# Altium PCB ROS_CAR.PcbDoc (part 7 of 13)
Units mil, origin at the board's own origin, x right, y up, seen from the top; angles counter-clockwise.
Board outline 3937.01 x 3937.01 mil, 2 copper layers (Top Layer, Bottom Layer); 201 components, 155 nets, 998 pads, 0 vias.
Unrouted connection lines stored in the file: 3.
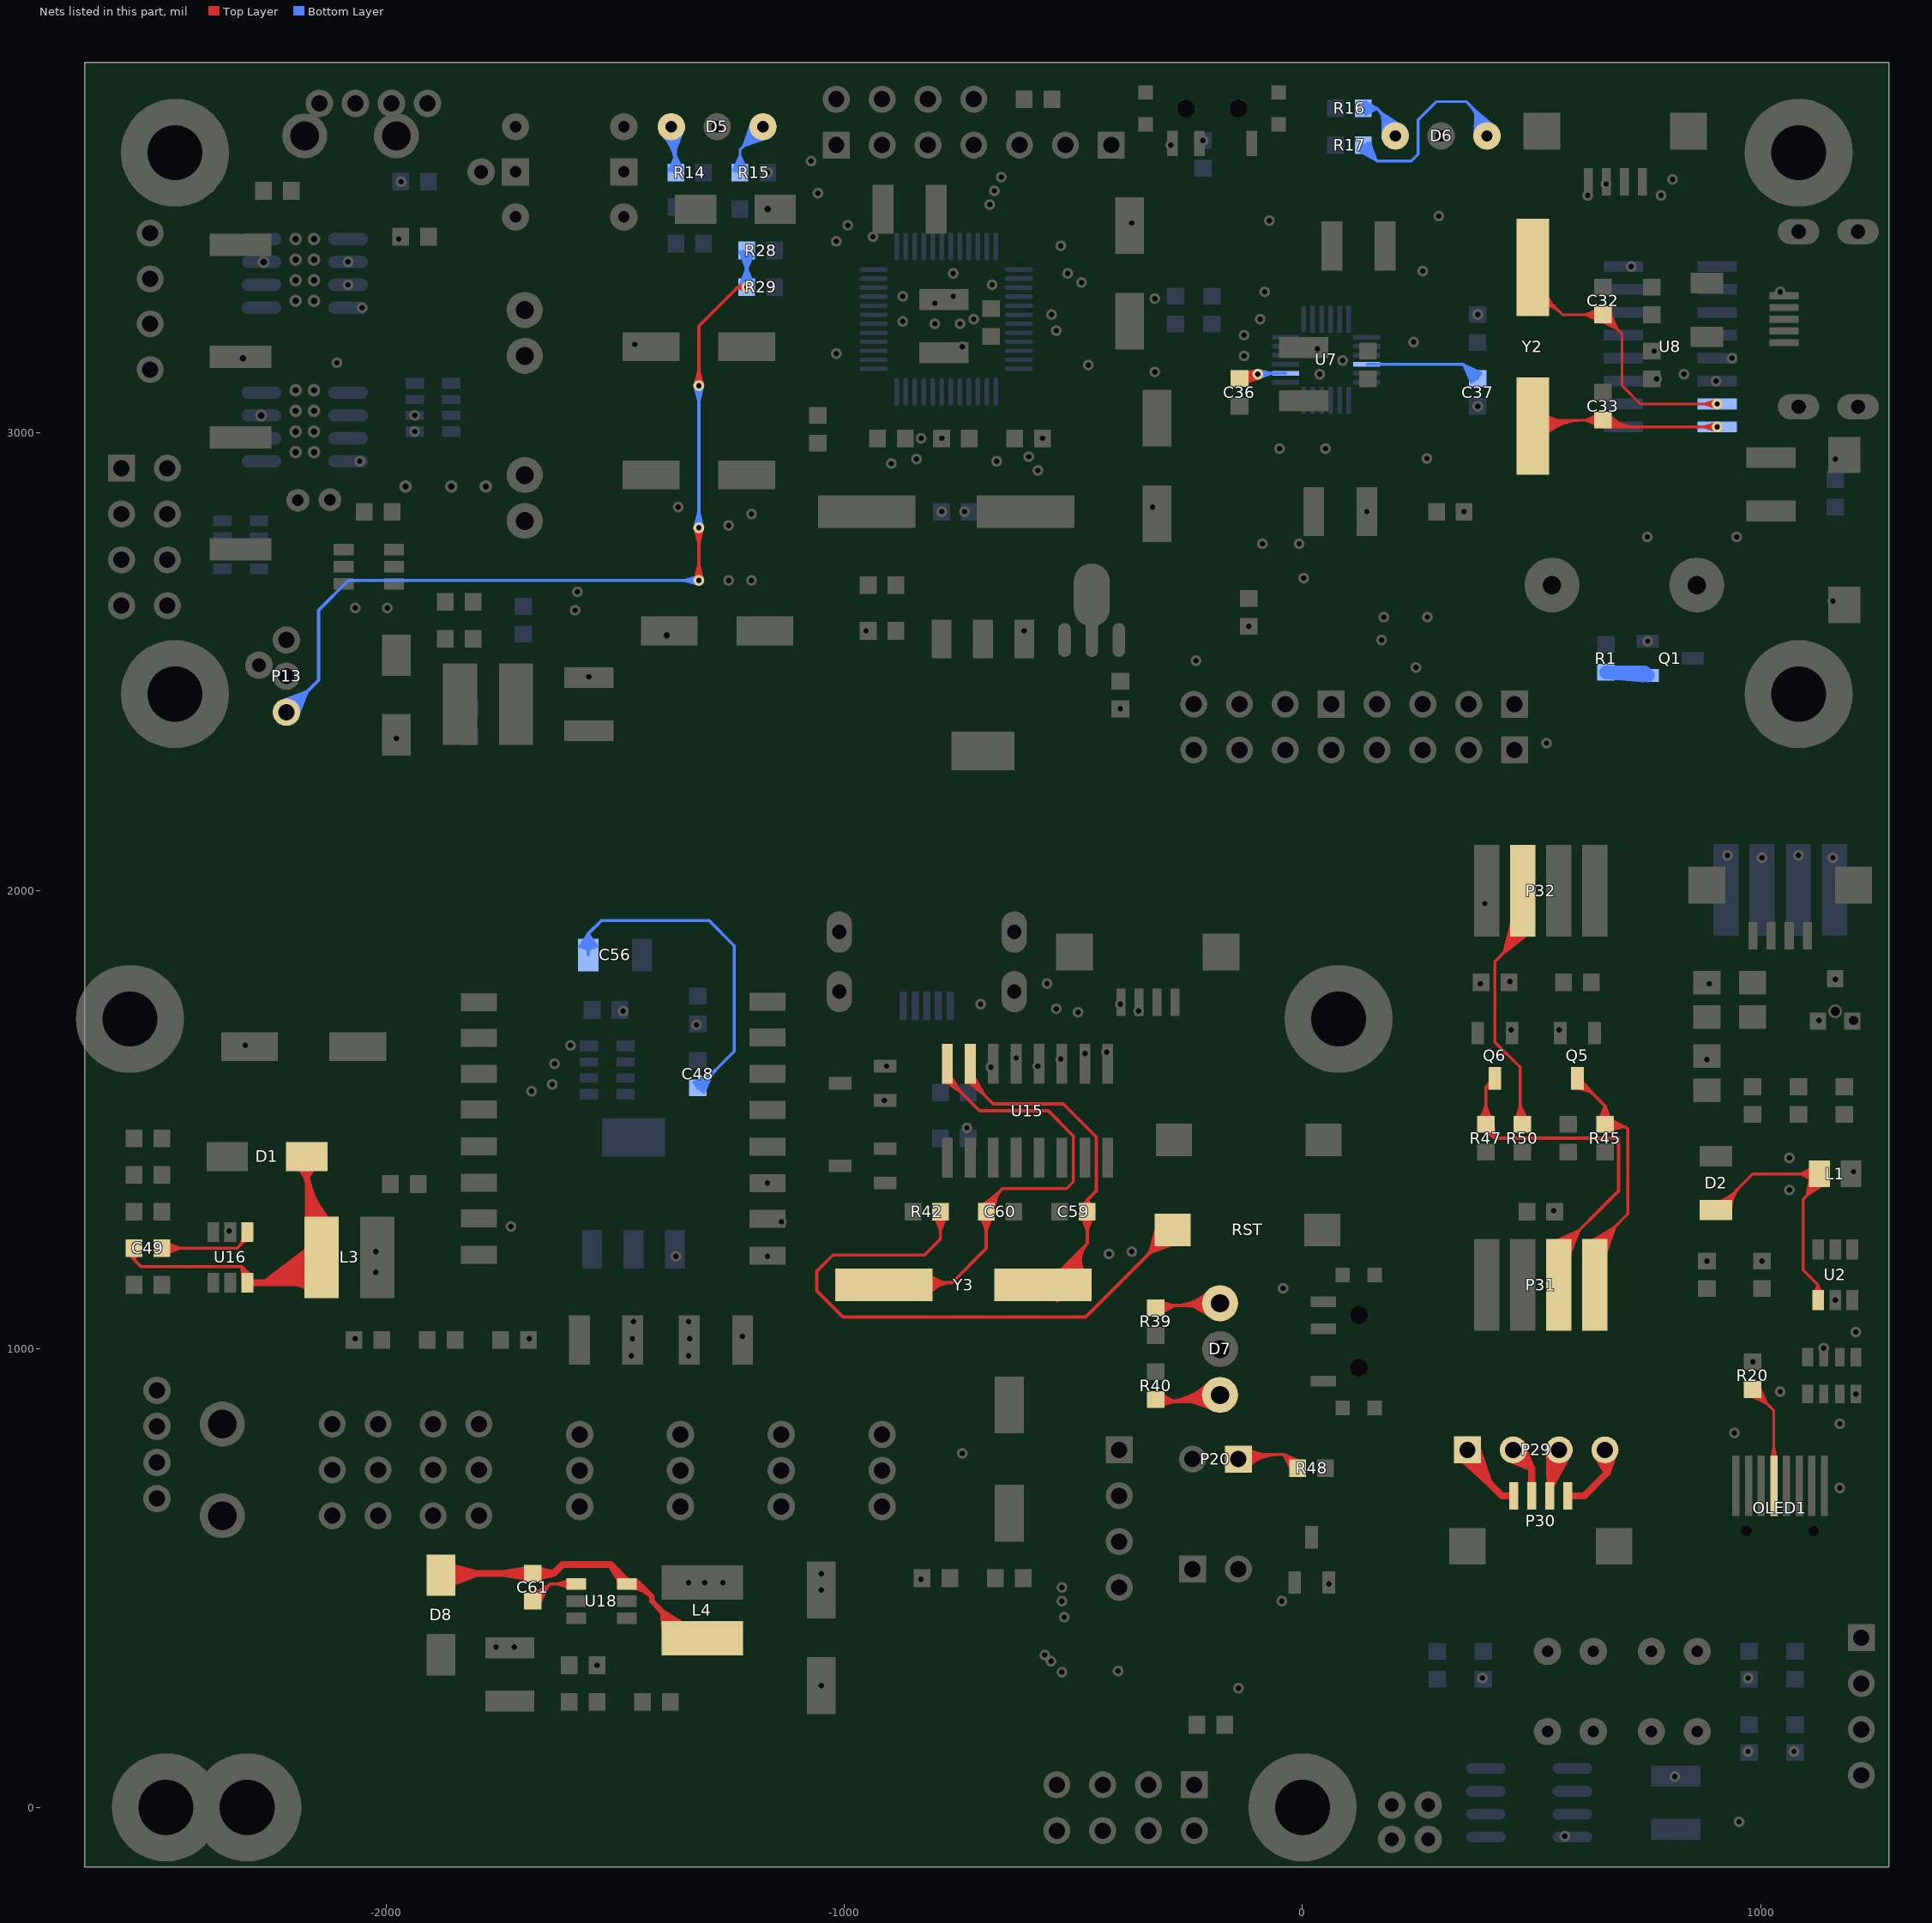
[diagram p7: the nets of this part, all layers, seen from the top]

## Nets (pads, with @x,y where several pads share a name; then routed paths per layer and width w, separated by ;. In a path a pad name is that pad's centre, name@x,y a point inside that pad or via, vN(x,y) a via of type N, cw(c..) or ccw(c..) an arc to the next point about the centre after c; other vN are vias at no path point) (continued)
NetC32_2: C32.2 pad.1@904.88,3062.09 U8.7 Y2.2 | length 2034.1
  Top Layer w6: Y2.2@501.48,3292.86 cw(c513.28,3254.29) 541.8,3282.81 ; Y2.2@501.66,3281.06 543.63,3280.97 ; Y2.2@502.08,3275.02 543.63,3280.97 ; Y2.2@503.23,3287.12 cw(c516.58,3243.48) 548.85,3275.75 ; Y2.2@503.39,3269.03 543.63,3280.97 ; Y2.2@504.99,3281.38 cw(c519.89,3232.67) 555.91,3268.69 ; Y2.2@505.04,3297.5 543.63,3280.97 ; Y2.2@505.61,3263.2 543.63,3280.97 ; Y2.2@506.74,3275.65 cw(c523.2,3221.86) 562.97,3261.63 ; Y2.2@507.52,3317.09 567.83,3256.77 C32.2@655.51,3256.77 697.52,3214.76 697.52,3102.09 737.52,3062.09 pad.1@904.88,3062.09 ; Y2.2@507.82,3302.87 543.63,3280.97 ; Y2.2@508.75,3257.62 543.63,3280.97 ; Y2.2@511.39,3307.86 543.63,3280.97 ; Y2.2@515.74,3312.34 543.63,3280.97 ; Y2.2@520.83,3316.22 543.63,3280.97 ; C32.2@643.7,3245.95 ccw(c617.57,3219.82) 617.57,3256.77 ccw(c617.57,3293.73) C32.2@643.7,3267.6 ; C32.2@647.56,3244.34 686.55,3225.74 ; C32.2@647.95,3250.19 ccw(c632.06,3234.3) 632.06,3256.77 ccw(c632.06,3279.24) C32.2@647.95,3263.35 ; C32.2@650.55,3249.61 686.55,3225.74 ; C32.2@651.3,3241.81 618.22,3256.77 ; C32.2@651.3,3271.73 618.22,3256.77 ; C32.2@653.33,3247.54 618.22,3256.77 ; C32.2@653.33,3266 618.22,3256.77 ; C32.2@654.21,3254.38 686.55,3225.74 ; C32.2@654.38,3253.47 618.22,3256.77 ; C32.2@654.38,3260.08 618.22,3256.77 ; C32.2@654.53,3256.77 618.22,3256.77 ; C32.2@656.5,3241.46 cw(c656.5,3206.89) 680.95,3231.34 ; C32.2@656.5,3247.46 cw(c656.5,3227.37) C32.2@670.7,3241.58 ; C32.2@656.5,3256.77 686.55,3225.74 ; C32.2@658.96,3258.98 686.55,3225.74 ; C32.2@663.84,3262.49 686.55,3225.74 ; C32.2@665.8,3256.77 ccw(c690.65,3256.77) C32.2@673.08,3239.2 ; C32.2@669.21,3265.3 686.55,3225.74 ; C32.2@671.8,3256.77 ccw(c711.13,3256.77) 683.32,3228.96 ; pad.1@898.65,3055.86 ccw(c883.61,3040.82) 883.61,3062.09 ccw(c883.61,3083.36) pad.1@898.65,3068.32 ; pad.1@903.58,3053.37 875.07,3062.09 pad.1@903.58,3070.8
NetC33_2: C33.2 pad.1@904.88,3012.09 U8.8 Y2.1 | length 2411
  Top Layer w6: Y2.1@501.04,3028.22 557.33,3026.77 ; Y2.1@501.21,3022.19 557.33,3026.77 ; Y2.1@501.52,3034.27 557.33,3026.77 ; Y2.1@502.67,3040.29 557.33,3026.77 ; Y2.1@502.83,3026.77 C33.2@655.51,3026.77 670.2,3012.09 pad.1@904.88,3012.09 ; Y2.1@504.24,3012.14 cw(c539.57,2976.81) 539.57,3026.77 ; Y2.1@504.49,3046.23 557.33,3026.77 ; Y2.1@505.06,3005.82 557.33,3026.77 ; Y2.1@507.6,3000.35 557.33,3026.77 ; Y2.1@508.48,3007.9 cw(c554.05,2962.33) 554.05,3026.77 ; Y2.1@510.74,2995.15 557.33,3026.77 ; Y2.1@512.73,3003.65 cw(c568.54,2947.84) 568.54,3026.77 ; Y2.1@514.45,2990.27 557.33,3026.77 ; Y2.1@516.97,2999.41 cw(c583.02,2933.35) 583.02,3026.77 ; Y2.1@518.73,2985.77 557.33,3026.77 ; Y2.1@521.21,2995.17 cw(c597.51,2918.87) 597.51,3026.77 ; Y2.1@525.45,2990.93 cw(c611.99,2904.38) 611.99,3026.77 ; Y2.1@525.45,3036.79 ccw(c549.65,3060.98) 549.65,3026.77 ; C33.2@643.7,3015.95 ccw(c617.57,2989.82) 617.57,3026.77 ccw(c617.57,3063.73) C33.2@643.7,3037.6 ; C33.2@647.95,3020.19 ccw(c632.06,3004.3) 632.06,3026.77 ccw(c632.06,3049.24) C33.2@647.95,3033.35 ; C33.2@650.35,3020.62 ccw(c670.96,3041.24) C33.2@670.96,3012.09 ; C33.2@651.3,3011.81 618.22,3026.77 ; C33.2@651.3,3041.73 618.22,3026.77 ; C33.2@653.33,3017.54 618.22,3026.77 ; C33.2@653.33,3036 618.22,3026.77 ; C33.2@654.21,3011.64 702.51,3012.09 ; C33.2@654.38,3023.47 618.22,3026.77 ; C33.2@654.38,3030.08 618.22,3026.77 ; C33.2@654.53,3017.67 702.51,3012.09 ; C33.2@654.53,3026.77 618.22,3026.77 ; C33.2@654.59,3024.87 ccw(c685.45,3055.72) 685.45,3012.09 ; C33.2@655.6,3023.59 702.51,3012.09 ; C33.2@656.5,3026.77 702.51,3012.09 ; C33.2@657.61,3029.89 702.51,3012.09 ; C33.2@658.83,3029.11 ccw(c699.93,3070.21) 699.93,3012.09 ; C33.2@660.17,3035.32 702.51,3012.09 ; C33.2@663.08,3033.35 ccw(c714.42,3084.69) 714.42,3012.09 ; C33.2@663.4,3040.43 702.51,3012.09 ; C33.2@667.32,3037.6 ccw(c728.9,3099.18) 728.9,3012.09 ; pad.1@898.65,3005.86 ccw(c883.61,2990.82) 883.61,3012.09 ccw(c883.61,3033.36) pad.1@898.65,3018.32 ; pad.1@903.58,3003.37 875.07,3012.09 pad.1@903.58,3020.8
NetC36_2: C36.2 pad.1@-97.48,3127.09 U7.20 | length 1459.9
  Top Layer w6: C36.2@-137.72,3126.63 pad.1@-98.96,3127.09 ; C36.2@-137.48,3117.4 -127.8,3127.09 pad.1@-97.48,3127.09 ; C36.2@-137.32,3132.69 pad.1@-98.96,3127.09 ; C36.2@-137.19,3120.64 pad.1@-98.96,3127.09 ; C36.2@-136.5,3117.4 pad.1@-98.96,3127.09 ; C36.2@-135.53,3114.24 pad.1@-98.96,3127.09 ; C36.2@-133.49,3116.02 cw(c-116.21,3108.07) -116.21,3127.09 ; C36.2@-133.11,3108.73 pad.1@-98.96,3127.09 ; C36.2@-129.82,3103.63 pad.1@-98.96,3127.09 ; C36.2@-128.04,3113.51 cw(c-106.85,3103.76) pad.1@-106.85,3127.09 ; C36.2@-122.59,3111 cw(c-97.48,3099.45) pad.1@-97.48,3127.09 ; pad.1@-103.71,3120.86 ccw(c-118.75,3105.82) -118.75,3127.09 ccw(c-118.75,3148.36) pad.1@-103.71,3133.32 ; pad.1@-103.54,3133.49 C36.2@-123.97,3108.07 ; pad.1@-102.54,3134.3 C36.2@-125.38,3112.89 ; pad.1@-101.45,3134.95 C36.2@-126.39,3117.45 ; pad.1@-100.8,3135.25 C36.2@-126.79,3119.91 ; pad.1@-100.14,3135.49 C36.2@-127.07,3122.34 ; pad.1@-99.96,3118.63 C36.2@-127.13,3131.2 ; pad.1@-98.88,3135.79 C36.2@-127.29,3126.75 ; pad.1@-98.78,3118.37 -127.29,3127.09 pad.1@-98.78,3135.8 ; pad.1@-98.68,3118.36 C36.2@-127.29,3126.75 ; pad.1@-97.57,3135.9 C36.2@-127.13,3131.2 ; pad.1@-97.38,3118.28 C36.2@-127.07,3122.34 ; pad.1@-96.66,3118.31 C36.2@-126.79,3119.91 ; pad.1@-95.93,3118.41 C36.2@-126.39,3117.45 ; pad.1@-94.63,3118.75 C36.2@-125.38,3112.89 ; pad.1@-93.36,3119.3 C36.2@-123.97,3108.07 ; C36.2@-127.29,3126.75 pad.1@-97.48,3127.09 ; C36.2@-127.13,3131.2 pad.1@-97.48,3127.09 ; C36.2@-127.07,3122.34 pad.1@-97.48,3127.09 ; C36.2@-126.79,3119.91 pad.1@-97.48,3127.09 ; C36.2@-126.39,3117.45 pad.1@-97.48,3127.09 ; C36.2@-125.38,3112.89 pad.1@-97.48,3127.09 ; C36.2@-123.97,3108.07 pad.1@-97.48,3127.09
  Bottom Layer w6: pad.1@-95.76,3135.73 -84.38,3128.98 ; pad.1@-93.39,3119.28 -84.38,3128.98 ; pad.1@-91.25,3120.86 cw(c-71.65,3101.25) -71.65,3128.98 ; pad.1@-91.25,3133.32 ccw(c-80.77,3143.8) -80.77,3128.98 ; pad.1@-89.37,3128.98 U7.20@-36.85,3128.98 ; U7.20@-61.46,3128.98 -84.38,3128.98 ; pad.1@-97.48,3127.09 -67.37,3128.98 ; pad.1@-97.48,3127.09 -84.38,3128.98 ; pad.1@-97.48,3127.09 -67.6,3128.98 ; -67.6,3128.98 -95.64,3118.47 -67.37,3128.98 ; -67.6,3128.98 -96.74,3135.87 -67.37,3128.98
NetC37_2: C37.2 U7.10 | length 673.8
  Bottom Layer w6: U7.10@140.31,3148.66 351.26,3148.66 C37.2@382.52,3117.4 ; U7.10@164.92,3148.66 187.84,3148.66 ; 354.71,3145.21 cw(c326.9,3117.4) C37.2@366.23,3117.4 ; 357.08,3142.84 ccw(c381.54,3167.29) C37.2@381.54,3132.71 ; C37.2@364.95,3134.97 cw(c347.38,3117.4) C37.2@372.23,3117.4 ; C37.2@367.33,3132.59 ccw(c381.54,3146.8) C37.2@381.54,3126.71 ; C37.2@368.83,3108.87 351.48,3148.44 ; C37.2@374.19,3111.69 351.48,3148.44 ; C37.2@379.07,3115.19 351.48,3148.44 ; C37.2@381.54,3117.4 351.48,3148.44 ; C37.2@383.82,3119.79 351.48,3148.44 ; C37.2@387.49,3124.56 351.48,3148.44 ; C37.2@390.47,3129.83 351.48,3148.44
NetC48_1: C48.1 C56.2 | length 1320
  Bottom Layer w7: C56.2@-1576.64,1878.49 -1558.66,1906.34 ; C56.2@-1570.22,1875.27 -1558.66,1906.34 ; C56.2@-1568.32,1889.25 ccw(c-1578.6,1906.34) -1558.66,1906.34 ; C56.2@-1563.39,1873.53 -1558.66,1906.34 ; C56.2@-1558.66,1860 -1558.66,1906.34 ; C56.2@-1558.66,1873.19 -1558.66,1906.34 ; C56.2@-1553.93,1873.53 -1558.66,1906.34 ; C56.2@-1549,1889.25 cw(c-1538.72,1906.34) -1558.66,1906.34 ; C56.2@-1547.1,1875.27 -1558.66,1906.34 ; C56.2@-1540.68,1878.49 -1558.66,1906.34 ; C48.1@-1327.85,1581.57 -1286.84,1602.84 ; C48.1@-1324.14,1575.58 -1286.84,1602.84 ; C48.1@-1320,1569.68 -1240,1649.68 -1240,1880 -1295,1935 -1530,1935 -1558.66,1906.34 ; C48.1@-1319.02,1569.68 -1286.84,1602.84 ; C48.1@-1319.02,1584.49 ccw(c-1319.02,1617.86) -1295.42,1594.27 ; C48.1@-1312.97,1564.74 -1286.84,1602.84 ; C48.1@-1311.21,1569.68 cw(c-1289.98,1569.68) C48.1@-1304.99,1584.69 ; C48.1@-1306.87,1561.21 -1286.84,1602.84 ; C48.1@-1304.21,1569.68 cw(c-1266.09,1569.68) -1293.04,1596.64
NetC49_1: C49.1 U16.1 | length 478.3
  Top Layer w7: C49.1@-2489.68,1220 -2325,1220 U16.1@-2300,1245 ; C49.1@-2488.91,1212.23 -2450.38,1220 ; C49.1@-2488.91,1227.77 -2450.38,1220 ; C49.1@-2486.9,1205.46 -2450.38,1220 ; C49.1@-2486.9,1234.54 -2450.38,1220 ; C49.1@-2484.16,1214.48 cw(c-2470.84,1201.15) -2470.84,1220 cw(c-2470.84,1238.85) C49.1@-2484.16,1225.52 ; C49.1@-2479.21,1209.53 cw(c-2453.94,1184.25) -2453.94,1220 cw(c-2453.94,1255.75) C49.1@-2479.21,1230.47 ; -2321.19,1223.81 ccw(c-2343.65,1246.26) U16.1@-2311.89,1246.26 ; -2311.88,1233.12 cw(c-2302.6,1223.84) U16.1@-2302.6,1236.96
NetC49_2: C49.2 D1.2 L3.1 U16.6 | length 4048.4
  Top Layer w7: C49.2@-2564.38,1214.39 -2550.32,1195.32 ; C49.2@-2558.02,1217.73 -2550.32,1195.32 ; C49.2@-2556.81,1205.71 cw(c-2561.88,1195.32) -2550.32,1195.32 ; C49.2@-2550.32,1219.02 -2550.32,1195.32 ; C49.2@-2550.32,1220 -2550.32,1195.32 ; C49.2@-2543.82,1205.71 ccw(c-2538.75,1195.32) -2550.32,1195.32 ; C49.2@-2542.61,1217.73 -2550.32,1195.32 ; C49.2@-2536.25,1214.39 -2550.32,1195.32 ; -2312.3,1177.3 cw(c-2331.13,1158.48) U16.6@-2304.86,1154.12 ; U16.6@-2311.53,1151.17 -2315,1180 ; -2302.68,1167.68 cw(c-2314.62,1155.73) U16.6@-2297.96,1152.97 ; U16.6@-2302.6,1153.74 -2315,1180 ; U16.6@-2300,1165 -2315,1180 ; U16.6@-2294.94,1159 -2315,1180 ; D1.2@-2200.37,1412.53 -2173.39,1367.5 ; D1.2@-2193.96,1415.8 -2173.39,1367.5 ; D1.2@-2193.18,1400.2 cw(c-2240.97,1352.41) -2173.39,1352.41 cw(c-2105.8,1352.41) D1.2@-2153.59,1400.2 ; D1.2@-2188.23,1405.15 cw(c-2224.07,1369.31) -2173.39,1369.31 cw(c-2122.7,1369.31) D1.2@-2158.54,1405.15 ; D1.2@-2187.26,1418.13 -2173.39,1367.5 ; D1.2@-2183.28,1410.1 cw(c-2207.18,1386.21) -2173.39,1386.21 cw(c-2139.6,1386.21) D1.2@-2163.49,1410.1 ; D1.2@-2180.37,1419.53 -2173.39,1367.5 ; L3.1@-2173.99,1243.29 -2173.39,1313.54 ; L3.1@-2173.39,1275.96 ccw(c-2116.24,1275.96) L3.1@-2156.65,1235.56 ; -2173.39,1292.86 ccw(c-2099.35,1292.86) L3.1@-2151.7,1240.5 ; -2173.39,1309.76 ccw(c-2082.45,1309.76) L3.1@-2146.75,1245.45 ; -2173.39,1326.66 ccw(c-2065.55,1326.66) L3.1@-2141.8,1250.4 ; -2173.39,1343.56 ccw(c-2048.65,1343.56) L3.1@-2136.85,1255.35 ; -2173.39,1360.46 ccw(c-2031.75,1360.46) L3.1@-2131.9,1260.3 ; -2173.39,1377.36 ccw(c-2014.85,1377.36) L3.1@-2126.95,1265.25 ; D1.2@-2173.39,1394.26 ccw(c-1997.95,1394.26) L3.1@-2122,1270.2 ; D1.2@-2173.39,1411.16 ccw(c-1981.05,1411.16) L3.1@-2117.05,1275.15 ; L3.1@-2166.83,1243.59 -2173.39,1313.54 ; D1.2@-2166.41,1419.53 -2173.39,1367.5 ; L3.1@-2159.81,1244.61 -2173.39,1313.54 ; D1.2@-2159.51,1418.13 -2173.39,1367.5 ; L3.1@-2152.97,1246.32 -2173.39,1313.54 ; D1.2@-2152.81,1415.8 -2173.39,1367.5 ; L3.1@-2146.37,1248.69 -2173.39,1313.54 ; D1.2@-2146.4,1412.53 -2173.39,1367.5 ; L3.1@-2140,1210 -2173.39,1243.39 D1.2@-2173.39,1420 -2173.39,1367.5 ; L3.1@-2135.9,1254.12 -2173.39,1313.54 ; L3.1@-2130.17,1258.15 -2173.39,1313.54 ; L3.1@-2124.84,1262.76 -2173.39,1313.54 ; L3.1@-2119.96,1267.91 -2173.39,1313.54 ; L3.1@-2115.59,1273.6 -2173.39,1313.54 ; -2550.32,1195.32 -2535,1180 -2315,1180
  Top Layer w15: U16.6@-2302.6,1144.88 -2175.12,1144.88 L3.1@-2160,1160 ; -2222.72,1144.88 ccw(c-2222.72,1230.51) L3.1@-2162.17,1169.96 ; -2203.71,1144.88 cw(c-2203.71,1086.13) L3.1@-2162.17,1127.68 ; -2186.5,1144.88 ccw(c-2186.5,1194.3) L3.1@-2151.56,1159.36 ; L3.1@-2156.34,1225.68 -2262.61,1144.88 ; L3.1@-2147.92,1213.21 -2262.61,1144.88 ; L3.1@-2141.02,1200 -2262.61,1144.88 ; L3.1@-2135.64,1186.11 -2262.61,1144.88 ; L3.1@-2131.81,1171.55 -2262.61,1144.88
NetC59_2: C59.2 U15.7 Y3.2 | length 2776.1
  Top Layer w7: U15.7@-730.88,1584.99 -695.67,1555.67 ; U15.7@-725,1590.87 -695.67,1555.67 ; U15.7@-725,1622.36 -725,1585 -675,1535 -522.4,1535 -450,1462.6 -450,1345 -469.69,1325.32 ; U15.7@-723.69,1590.87 ccw(c-706.36,1590.87) -718.61,1578.61 ; U15.7@-718.16,1595.59 -695.67,1555.67 ; U15.7@-716.69,1590.87 ccw(c-682.46,1590.87) -706.66,1566.66 ; Y3.2@-540,1140 -540,1160 -469.69,1230.32 ; Y3.2@-535.02,1105.63 cw(c-501.32,1135.24) Y3.2@-533.04,1166.96 ; Y3.2@-529.76,1110.25 cw(c-495.7,1140.18) Y3.2@-527.76,1172.24 ; Y3.2@-527.84,1140.17 -511.62,1188.38 ; Y3.2@-524.5,1114.87 cw(c-490.08,1145.12) -522.48,1177.52 ; Y3.2@-520.78,1138.35 -511.62,1188.38 ; Y3.2@-519.24,1119.49 cw(c-484.46,1150.06) -517.2,1182.8 ; Y3.2@-513.98,1124.11 cw(c-478.84,1155) -511.92,1188.08 ; Y3.2@-513.67,1137.55 -511.62,1188.38 ; Y3.2@-508.73,1128.73 cw(c-473.22,1159.93) -506.64,1193.36 ; Y3.2@-506.61,1137.76 -511.62,1188.38 ; Y3.2@-503.47,1133.35 cw(c-467.6,1164.87) -501.36,1198.64 ; Y3.2@-499.69,1138.93 -511.62,1188.38 ; Y3.2@-498.21,1137.98 cw(c-461.98,1169.81) -496.08,1203.92 ; Y3.2@-492.95,1142.6 cw(c-456.36,1174.75) -490.8,1209.2 ; Y3.2@-492.21,1141.36 -511.62,1188.38 ; Y3.2@-487.69,1147.22 cw(c-450.74,1179.69) -485.53,1214.47 ; Y3.2@-485.93,1144.47 -511.62,1188.38 ; C59.2@-484.23,1296.23 -469.69,1259.71 ; C59.2@-483.79,1305.49 -469.69,1325.32 ; Y3.2@-482.43,1151.84 cw(c-445.12,1184.63) -480.25,1219.75 ; C59.2@-480.16,1288.55 cw(c-505.43,1263.27) -469.68,1263.27 cw(c-433.94,1263.27) C59.2@-459.21,1288.55 ; Y3.2@-480.09,1148.46 -511.62,1188.38 ; C59.2@-477.45,1298.24 -469.69,1259.71 ; C59.2@-477.39,1302.24 -469.69,1325.32 ; Y3.2@-477.18,1156.46 cw(c-439.5,1189.57) -474.97,1225.03 ; C59.2@-476.49,1314.14 ccw(c-482.27,1325.31) -469.68,1325.31 ; C59.2@-475.21,1293.5 cw(c-488.53,1280.17) -469.69,1280.17 cw(c-450.84,1280.17) C59.2@-464.16,1293.5 ; Y3.2@-474.8,1153.28 -511.62,1188.38 ; Y3.2@-471.92,1161.08 cw(c-433.88,1194.51) -469.69,1230.31 ; Y3.2@-470.16,1158.9 -511.62,1188.38 ; C59.2@-469.69,1299.02 -469.69,1259.71 ; C59.2@-469.69,1300.98 -469.69,1325.32 ; C59.2@-462.88,1314.14 cw(c-457.1,1325.31) -469.69,1325.31 ; C59.2@-461.98,1302.24 -469.69,1325.32 ; C59.2@-461.92,1298.24 -469.69,1259.71 ; C59.2@-455.58,1305.49 -469.69,1325.32 ; C59.2@-455.14,1296.23 -469.69,1259.71 ; -469.69,1230.32 -469.69,1325.32
NetC60_2: C60.2 U15.8 Y3.1 | length 2576
  Top Layer w7: Y3.1@-895,1145 -765,1145 ; Y3.1@-842.57,1143.93 -785.92,1145 ; Y3.1@-842.27,1150.93 -785.92,1145 ; Y3.1@-841.88,1136.1 -785.92,1145 ; Y3.1@-841.1,1157.89 -785.92,1145 ; Y3.1@-840.35,1129.25 -785.92,1145 ; Y3.1@-839.04,1164.71 -785.92,1145 ; Y3.1@-837.97,1122.61 -785.92,1145 ; Y3.1@-836.1,1171.31 -785.92,1145 ; Y3.1@-834.75,1116.26 -785.92,1145 ; Y3.1@-830.7,1110.27 -785.92,1145 ; Y3.1@-828.42,1128.72 cw(c-794.33,1101.16) -794.33,1145 ; Y3.1@-824.73,1157.63 ccw(c-794.24,1188.12) -794.24,1145 ; Y3.1@-822.97,1124.32 cw(c-779.67,1089.31) -779.67,1145 ; Y3.1@-819.78,1162.58 ccw(c-777.34,1205.02) -777.34,1145 ; Y3.1@-817.53,1119.92 cw(c-765,1077.45) -765,1145 ; U15.8@-780.34,1584.5 -746.6,1561.6 ; U15.8@-775,1582.55 cw(c-775,1564.58) -762.29,1577.29 ; U15.8@-775,1590.87 -746.6,1561.6 ; U15.8@-775,1622.36 -775,1590 -705,1520 -555,1520 -500,1465 -500,1365 -515,1350 -655,1350 C60.2@-695,1310 ; U15.8@-768.48,1596.02 -746.6,1561.6 ; U15.8@-766.69,1590.87 ccw(c-744.53,1590.87) -760.2,1575.2 ; C60.2@-704.86,1296.23 -690.32,1259.71 ; C60.2@-701.31,1310.91 -665.63,1339.37 ; C60.2@-700.79,1288.55 cw(c-726.06,1263.27) -690.32,1263.27 cw(c-654.57,1263.27) C60.2@-679.84,1288.55 ; C60.2@-698.08,1298.24 -690.32,1259.71 ; C60.2@-696.5,1305.75 -665.63,1339.37 ; C60.2@-695.84,1293.5 cw(c-709.16,1280.17) -690.32,1280.17 cw(c-671.47,1280.17) C60.2@-684.79,1293.5 ; C60.2@-690.32,1299.02 -690.32,1259.71 ; C60.2@-690.32,1300 -690.32,1219.68 -765,1145 ; C60.2@-690.32,1300.98 -665.63,1339.37 ; C60.2@-689.51,1300.98 cw(c-654.48,1300.98) -679.25,1325.75 ; C60.2@-683.41,1297.34 -665.63,1339.37 ; C60.2@-682.55,1298.24 -690.32,1259.71 ; C60.2@-682.51,1300.98 cw(c-630.58,1300.98) -667.3,1337.7 ; C60.2@-676.73,1295.1 -665.63,1339.37 ; C60.2@-675.77,1296.23 -690.32,1259.71 ; C60.2@-675.51,1300.98 cw(c-606.68,1300.98) -655.35,1349.65
NetC61_1: C61.1 U18.1 | length 551
  Top Layer w7: C61.1@-1687.85,461.57 -1646.84,482.84 ; C61.1@-1684.14,455.58 -1646.84,482.84 ; C61.1@-1680,449.68 -1642.28,487.4 U18.1@-1585.12,487.4 ; C61.1@-1679.02,449.68 -1646.84,482.84 ; C61.1@-1679.02,464.49 ccw(c-1679.02,497.86) -1655.42,474.27 ; C61.1@-1672.97,444.74 -1646.84,482.84 ; C61.1@-1671.21,449.68 cw(c-1649.98,449.68) C61.1@-1664.99,464.69 ; C61.1@-1666.87,441.21 -1646.84,482.84 ; C61.1@-1664.21,449.68 cw(c-1626.09,449.68) -1653.04,476.64 ; U18.1@-1600.55,480.83 ccw(c-1616.42,464.96) -1616.42,487.4 ccw(c-1616.42,509.84) U18.1@-1600.55,493.97 ; U18.1@-1595.25,478.19 -1627.77,487.4 ; U18.1@-1595.25,496.61 -1627.77,487.4 ; U18.1@-1593.98,487.4 -1627.77,487.4
NetC61_2: C61.2 D8.2 L4.1 U18.6 | length 2450.5
  Top Layer w7: U18.6@-1475,495 -1475,487.52 U18.6@-1474.88,487.4
  Top Layer w12: U18.6@-1474.88,487.4 -1447.4,487.4 ; U18.6@-1468.57,491.94 cw(c-1460.68,477.89) -1449.28,489.28 ; U18.6@-1466.02,480.61 cw(c-1466.02,419.24) -1422.63,462.63 ; U18.6@-1466.02,492.61 cw(c-1466.02,460.21) -1443.12,483.12 ; U18.6@-1462.7,481.48 cw(c-1452.63,463.56) -1438.09,478.09 ; U18.6@-1461.22,482.6 cw(c-1449.62,471) -1449.62,487.4 cw(c-1449.62,503.81) U18.6@-1461.22,492.21 ; -1410,440 cw(c-1481.03,368.98) L4.1@-1380.58,368.98 ; L4.1@-1391.07,359.33 -1396.11,426.11 ; -1389.52,419.52 cw(c-1440.06,368.98) L4.1@-1368.58,368.98 ; L4.1@-1379.03,361.36 -1396.11,426.11 ; -1376.88,406.88 ccw(c-1361.18,422.58) L4.1@-1361.18,400.38 ; L4.1@-1367.7,365.47 -1396.11,426.11 ; L4.1@-1361.18,368.98 -1396.11,426.11 ; L4.1@-1355.09,373.18 -1396.11,426.11 ; L4.1@-1355,385 -1420,450 -1420,460 -1447.4,487.4 ; L4.1@-1346.27,381.39 -1396.11,426.11 ; L4.1@-1338.98,391.18 -1396.11,426.11 ; -1447.4,487.4 -1466.02,487.4 -1447.4,487.4 ; -1447.4,487.4 -1464.78,480.72 -1447.4,487.4 ; -1447.4,487.4 -1464.78,494.08 -1447.4,487.4
  Top Layer w15: D8.2@-1880,506.61 -1803.32,510.31 ; D8.2@-1879.91,515.61 -1803.32,510.31 ; D8.2@-1879.04,497.67 -1803.32,510.31 ; D8.2@-1877.4,530.47 -1803.32,510.31 ; D8.2@-1876.3,510.31 -1634.68,510.31 ; D8.2@-1875.11,483.12 -1803.32,510.31 ; D8.2@-1863.03,489.65 cw(c-1813.13,439.75) -1813.13,510.32 ; D8.2@-1863.03,523.58 ccw(c-1831,555.61) -1831,510.31 ; C61.2@-1688.63,502.67 ccw(c-1707.07,484.22) -1707.07,510.31 ccw(c-1707.07,536.41) C61.2@-1688.63,517.96 ; C61.2@-1681.91,499.55 -1744.29,510.31 ; C61.2@-1681.91,521.08 -1744.29,510.31 ; C61.2@-1680.98,510.31 -1744.29,510.31 ; C61.2@-1679.02,510.31 -1634.68,510.31 ; C61.2@-1677.7,499.59 -1634.68,510.31 ; C61.2@-1677.7,521.04 -1634.68,510.31 ; C61.2@-1671.37,502.67 cw(c-1652.93,484.22) -1652.93,510.31 cw(c-1652.93,536.41) C61.2@-1671.37,517.96 ; -1504.33,524.33 cw(c-1541.26,487.4) U18.6@-1489.04,487.4 ; U18.6@-1483.74,487.4 -1510,530 ; U18.6@-1475,495 -1510,530 ; -1634.68,510.31 -1615,530 -1510,530
NetD2_A: D2.1 L1.2 U2.1 | length 1990.9
  Top Layer w6: D2.1@902.53,1317.45 938.36,1337.93 ; D2.1@905.95,1312.38 938.36,1337.93 ; D2.1@910.03,1307.92 938.36,1337.93 ; D2.1@912.52,1312.09 982.52,1382.09 L1.2@1128.07,1382.09 ; D2.1@915.71,1303.43 938.36,1337.93 ; D2.1@915.71,1322.67 ccw(c915.71,1340.52) 928.33,1327.9 ; D2.1@916.95,1303.43 cw(c948.57,1303.43) 926.21,1325.78 ; D2.1@922.09,1300 938.36,1337.93 ; D2.1@922.95,1303.43 cw(c969.05,1303.43) 936.45,1336.02 ; D2.1@927.8,1298.03 938.36,1337.93 ; D2.1@928.95,1303.43 cw(c989.54,1303.43) 946.7,1346.26 ; D2.1@933.81,1296.91 938.36,1337.93 ; D2.1@934.95,1303.43 cw(c1010.02,1303.43) 956.94,1356.51 ; 1099.19,1333.76 ccw(c1072.34,1360.61) L1.2@1108.95,1370.71 ; 1106.48,1341.05 ccw(c1083.76,1363.76) L1.2@1114.73,1372.31 ; L1.2@1109.71,1383.5 1100.68,1335.25 ; 1113.77,1348.33 ccw(c1095.19,1366.91) L1.2@1120.52,1373.9 ; L1.2@1114.05,1368.06 ccw(c1080.19,1334.2) 1080.19,1382.09 ccw(c1080.19,1429.97) L1.2@1114.05,1396.11 ; U2.1@1115.53,1117.85 1125.12,1139.49 ; L1.2@1115.62,1382.01 1100.68,1335.25 ; 1116.99,1351.56 cw(c1128.07,1340.49) L1.2@1128.07,1356.15 ; U2.1@1118.19,1122.75 ccw(c1101.47,1139.47) 1125.12,1139.47 ; L1.2@1118.29,1372.3 ccw(c1094.67,1348.69) 1094.67,1382.09 ccw(c1094.67,1415.49) L1.2@1118.29,1391.87 ; L1.2@1121.24,1379.82 1100.68,1335.25 ; U2.1@1121.34,1116.13 1125.12,1139.49 ; L1.2@1123.25,1362.85 1087.24,1382.09 ; L1.2@1123.25,1401.33 1087.24,1382.09 ; U2.1@1125.12,1106.97 1125.12,1139.49 ; U2.1@1125.12,1115.83 1125.12,1139.49 ; L1.2@1125.73,1368.45 1087.24,1382.09 ; L1.2@1125.73,1395.72 1087.24,1382.09 ; L1.2@1127.32,1374.29 1087.24,1382.09 ; L1.2@1127.32,1389.89 1087.24,1382.09 ; L1.2@1128.07,1375.98 1100.68,1335.25 ; U2.1@1128.9,1116.13 1125.12,1139.49 ; U2.1@1132.04,1122.75 cw(c1148.77,1139.47) 1125.12,1139.47 ; L1.2@1132.52,1367.09 1092.52,1327.09 1092.52,1172.09 1125.12,1139.49 ; L1.2@1134.2,1371.11 1100.68,1335.25 ; U2.1@1134.7,1117.85 1125.12,1139.49 ; L1.2@1138.35,1366.72 1100.68,1335.25 ; L1.2@1141.96,1361.82 1100.68,1335.25
NetD5_K1: D5.1 R14.2 | length 1197.4
  Bottom Layer w6: D5.1@-1401.68,3655.12 -1367.8,3617.06 ; D5.1@-1396.83,3658.93 -1367.8,3617.06 ; D5.1@-1396.57,3647.99 cw(c-1466.05,3578.52) R14.2@-1367.8,3578.52 ; D5.1@-1392.33,3652.24 cw(c-1451.56,3593.01) -1367.8,3593.01 ; D5.1@-1391.63,3662.1 -1367.8,3617.06 ; D5.1@-1388.09,3656.48 cw(c-1437.07,3607.49) -1367.8,3607.49 ; D5.1@-1386.13,3664.6 -1367.8,3617.06 ; D5.1@-1383.84,3660.72 cw(c-1422.59,3621.98) -1367.8,3621.98 ; R14.2@-1382.76,3571.3 -1367.8,3604.38 ; D5.1@-1379.6,3664.97 cw(c-1408.1,3636.46) -1367.8,3636.46 ; R14.2@-1378.62,3578.89 ccw(c-1404.75,3605.03) -1367.8,3605.03 ccw(c-1330.84,3605.03) R14.2@-1356.97,3578.89 ; D5.1@-1377.48,3657.09 -1367.8,3647.4 R14.2@-1367.8,3567.09 ; D5.1@-1377.48,3667.09 -1367.8,3617.06 ; R14.2@-1377.03,3569.26 -1367.8,3604.38 ; R14.2@-1374.38,3574.65 ccw(c-1390.26,3590.54) -1367.8,3590.54 ccw(c-1345.33,3590.54) R14.2@-1361.21,3574.65 ; R14.2@-1371.1,3568.22 -1367.8,3604.38 ; D5.1@-1368.53,3668.01 -1367.8,3617.06 ; R14.2@-1367.8,3568.07 -1367.8,3604.38 ; -1367.8,3625.28 cw(c-1335.68,3625.28) D5.1@-1358.39,3647.99 ; R14.2@-1364.49,3568.22 -1367.8,3604.38 ; D5.1@-1362.49,3667.74 -1367.8,3617.06 ; R14.2@-1358.57,3569.26 -1367.8,3604.38 ; D5.1@-1356.48,3666.74 -1367.8,3617.06 ; R14.2@-1352.83,3571.3 -1367.8,3604.38 ; D5.1@-1350.56,3665.01 -1367.8,3617.06
NetD5_K2: D5.3 R15.2 | length 1251.1
  Bottom Layer w6: R15.2@-1242.76,3571.3 -1227.8,3604.38 ; R15.2@-1238.62,3578.89 ccw(c-1264.75,3605.03) -1227.8,3605.03 ccw(c-1190.84,3605.03) R15.2@-1216.97,3578.89 ; R15.2@-1237.03,3569.26 -1227.8,3604.38 ; R15.2@-1234.38,3574.65 ccw(c-1250.26,3590.54) -1227.8,3590.54 ccw(c-1205.33,3590.54) R15.2@-1221.21,3574.65 ; R15.2@-1231.1,3568.22 -1227.8,3604.38 ; R15.2@-1227.8,3567.09 -1227.8,3616.77 D5.3@-1177.48,3667.09 -1220.21,3624.36 ; R15.2@-1227.8,3568.07 -1227.8,3604.38 ; R15.2@-1224.49,3568.22 -1227.8,3604.38 ; R15.2@-1218.57,3569.26 -1227.8,3604.38 ; R15.2@-1212.83,3571.3 -1227.8,3604.38 ; D5.3@-1204.48,3667.09 cw(c-1269.66,3667.09) -1223.57,3620.99 cw(c-1177.48,3574.9) D5.3@-1177.48,3640.09 ; D5.3@-1200.36,3681.43 -1220.21,3624.36 ; D5.3@-1198.48,3667.09 cw(c-1249.18,3667.09) -1213.33,3631.24 cw(c-1177.48,3595.39) D5.3@-1177.48,3646.09 ; D5.3@-1194.68,3679.13 -1220.21,3624.36 ; D5.3@-1192.48,3667.09 cw(c-1228.69,3667.09) -1203.09,3641.48 cw(c-1177.48,3615.87) D5.3@-1177.48,3652.09 ; D5.3@-1189.32,3676.29 -1220.21,3624.36 ; D5.3@-1184.3,3672.96 -1220.21,3624.36 ; D5.3@-1171.61,3660.27 -1220.21,3624.36 ; D5.3@-1168.27,3655.25 -1220.21,3624.36 ; D5.3@-1165.44,3649.88 -1220.21,3624.36 ; D5.3@-1163.14,3644.21 -1220.21,3624.36
NetD6_K1: D6.1 R16.2 | length 1034
  Bottom Layer w6: R16.2@132.83,3707.09 162.52,3707.09 ; R16.2@133.02,3703.78 162.52,3707.09 ; R16.2@133.02,3710.39 162.52,3707.09 ; R16.2@134.29,3697.89 162.52,3707.09 ; R16.2@134.29,3716.28 162.52,3707.09 ; R16.2@136.78,3692.3 162.52,3707.09 ; R16.2@136.78,3721.88 162.52,3707.09 ; R16.2@145.31,3698.21 cw(c162.52,3685.96) 162.52,3707.09 ; R16.2@145.31,3715.96 ccw(c162.52,3728.21) 162.52,3707.09 ; 161.27,3708.33 cw(c110.85,3657.91) D6.1@181.66,3649.55 ; 170.02,3699.58 cw(c126.5,3656.07) D6.1@187.62,3648.85 ; D6.1@176.62,3639.44 174.18,3695.43 ; 178.77,3690.83 cw(c142.15,3654.22) D6.1@193.58,3648.14 ; D6.1@182.73,3640.05 174.18,3695.43 ; 187.52,3682.09 cw(c157.8,3652.37) D6.1@199.54,3647.44 ; D6.1@188.68,3641.3 174.18,3695.43 ; 190.57,3679.04 ccw(c202.52,3690.99) D6.1@202.52,3674.09 ; D6.1@194.42,3643.17 174.18,3695.43 ; D6.1@202.52,3647.09 174.18,3695.43 ; D6.1@207.52,3662.09 162.52,3707.09 ; D6.1@209.89,3652.25 174.18,3695.43 ; D6.1@214.33,3656.34 174.18,3695.43 ; D6.1@218.32,3660.91 174.18,3695.43 ; D6.1@221.84,3665.95 174.18,3695.43
NetD6_K2: D6.3 R17.2 | length 1664.9
  Bottom Layer w6: R17.2@123.25,3614.17 160.78,3593.83 ; R17.2@126.5,3619.28 160.78,3593.83 ; R17.2@130.42,3623.84 160.78,3593.83 ; R17.2@132.83,3610.8 cw(c132.83,3584.3) 151.57,3603.03 ; R17.2@132.83,3626.1 160.78,3593.83 ; R17.2@132.83,3627.09 132.83,3621.77 162.52,3592.09 237.52,3592.09 252.52,3607.09 252.52,3682.09 292.52,3722.09 357.52,3722.09 402.52,3677.09 D6.3@402.52,3632.09 ; R17.2@135.42,3628.17 160.78,3593.83 ; R17.2@140.49,3631.39 160.78,3593.83 ; R17.2@142.13,3625.73 ccw(c171.29,3624.58) 150.66,3603.95 ; R17.2@146.02,3633.88 160.78,3593.83 ; R17.2@148.13,3625.5 ccw(c189.94,3623.84) 160.35,3594.25 ; 361.19,3718.42 cw(c297.03,3654.26) D6.3@387.55,3648.1 ; 370.52,3709.08 cw(c314.51,3653.07) D6.3@393.54,3647.7 ; D6.3@376.1,3641.53 377.06,3702.54 ; 379.86,3699.75 cw(c331.99,3651.88) D6.3@399.53,3647.29 ; D6.3@382.21,3641.74 377.06,3702.54 ; D6.3@388.22,3642.55 377.06,3702.54 ; 389.19,3690.42 cw(c349.47,3650.7) D6.3@405.51,3646.88 ; D6.3@394.09,3643.95 377.06,3702.54 ; 398.52,3681.08 cw(c366.94,3649.51) D6.3@411.5,3646.48 ; D6.3@402.52,3647.09 377.06,3702.54 ; D6.3@410.4,3651.43 377.06,3702.54 ; D6.3@415.28,3654.97 377.06,3702.54 ; D6.3@419.81,3659 377.06,3702.54 ; D6.3@423.96,3663.5 377.06,3702.54
NetD7_K1: D7.1 R40.2 | length 1552
  Top Layer w7: R40.2@-320,885 -195,885 D7.1@-180,900 ; R40.2@-319.17,881.88 -279.31,885 ; R40.2@-319.02,889.68 -279.31,885 ; R40.2@-318,874.91 -279.31,885 ; R40.2@-317.35,897.31 -279.31,885 ; R40.2@-314.59,903.81 -279.31,885 ; R40.2@-313.5,895.21 ccw(c-288.86,919.84) -288.86,885 ; R40.2@-308.55,879.21 cw(c-294.58,865.25) -294.58,885 ; R40.2@-308.55,900.16 ccw(c-271.96,936.74) -271.96,885 ; R40.2@-302.81,885 ccw(c-302.81,1022.81) D7.1@-205.36,925.36 ; -285.91,885 ccw(c-285.91,1005.91) D7.1@-200.41,920.41 ; -269.01,885 ccw(c-269.01,989.01) D7.1@-195.46,915.46 ; -252.11,885 ccw(c-252.11,972.11) D7.1@-190.51,910.51 ; -235.21,885 ccw(c-235.21,955.21) D7.1@-185.56,905.56 ; -230.38,885 cw(c-230.38,849.62) D7.1@-205.36,874.64 ; -218.31,885 ccw(c-218.31,938.31) D7.1@-180.62,900.62 ; D7.1@-197.73,931.18 -242.65,885 ; D7.1@-192.84,925.86 -242.65,885 ; D7.1@-188.63,920.1 -242.65,885 ; D7.1@-185.11,913.96 -242.65,885 ; D7.1@-182.3,907.53 -242.65,885 ; D7.1@-181.69,864.17 -242.65,885 ; D7.1@-179.74,871.13 -242.65,885 ; D7.1@-178.64,892.25 -242.65,885 ; D7.1@-178.59,878.18 -242.65,885 ; D7.1@-178.23,885.24 -242.65,885
NetD7_K2: D7.3 R39.2 | length 1396.2
  Top Layer w7: R39.2@-320,1095 D7.3@-185,1095 ; R39.2@-319.17,1098.12 -279.3,1095 ; R39.2@-319.02,1090.32 -279.3,1095 ; R39.2@-318,1105.09 -279.3,1095 ; R39.2@-317.35,1082.69 -279.3,1095 ; R39.2@-314.59,1076.19 -279.3,1095 ; R39.2@-313.5,1084.79 cw(c-288.86,1060.16) -288.86,1095 ; R39.2@-308.55,1079.84 cw(c-271.96,1043.26) -271.96,1095 ; R39.2@-308.55,1100.79 ccw(c-294.58,1114.75) -294.58,1095 ; -278.67,1095 ccw(c-278.67,1198.67) D7.3@-205.36,1125.36 ; -261.77,1095 ccw(c-261.77,1181.77) D7.3@-200.41,1120.41 ; -254.53,1095 cw(c-254.53,1025.47) D7.3@-205.36,1074.64 ; -244.87,1095 ccw(c-244.87,1164.87) D7.3@-195.46,1115.46 ; -237.63,1095 cw(c-237.63,1042.37) D7.3@-200.41,1079.59 ; -227.97,1095 ccw(c-227.97,1147.97) D7.3@-190.51,1110.51 ; -220.73,1095 cw(c-220.73,1059.27) D7.3@-195.46,1084.54 ; D7.3@-193.37,1133.28 -240.56,1095 ; D7.3@-189.14,1127.38 -240.56,1095 ; D7.3@-187.73,1064.97 -240.56,1095 ; D7.3@-185.69,1121.12 -240.56,1095 ; D7.3@-184.53,1071.49 -240.56,1095 ; D7.3@-183.03,1114.56 -240.56,1095 ; D7.3@-182.15,1078.24 -240.56,1095 ; D7.3@-181.15,1107.78 -240.56,1095 ; D7.3@-180.6,1085.14 -240.56,1095 ; D7.3@-179.86,1092.13 -240.56,1095
Netkey3_1: R42.2 RST.1 | length 2506.8
  Top Layer w7: R42.2@-804.25,1296.34 -790,1259.71 ; R42.2@-800.16,1288.55 cw(c-824.67,1264.03) -790,1264.03 ; R42.2@-797.46,1298.3 -790,1259.71 ; -790,1262.51 cw(c-753.18,1262.51) R42.2@-779.21,1288.55 ; -790,1279.41 cw(c-770.08,1279.41) R42.2@-784.16,1293.5 ; R42.2@-790,1290 -790,1240 -825,1205 -1025,1205 -1060,1170 -1060,1126.97 -1003.03,1070 -473.39,1070 RST.1@-283.39,1260 ; R42.2@-789.68,1299.02 -790,1259.71 ; R42.2@-781.92,1298.18 -790,1259.71 ; R42.2@-775.17,1296.11 -790,1259.71 ; -344.62,1198.77 ccw(c-405.85,1260) RST.1@-319.26,1260 ; -335.11,1208.27 cw(c-287.32,1160.48) RST.1@-287.32,1228.07 ; -332.67,1210.72 ccw(c-381.95,1260) RST.1@-312.26,1260 ; -323.17,1220.22 cw(c-287.32,1184.38) RST.1@-287.32,1235.07 ; -320.72,1222.67 ccw(c-358.06,1260) RST.1@-305.26,1260 ; RST.1@-315.21,1275.56 -333.67,1209.72 ; RST.1@-311.22,1232.17 cw(c-287.32,1208.28) RST.1@-287.32,1242.07 ; RST.1@-308.43,1273.27 -333.67,1209.72 ; RST.1@-301.99,1270.32 -333.67,1209.72 ; RST.1@-295.93,1266.74 -333.67,1209.72 ; RST.1@-290.29,1262.58 -333.67,1209.72 ; RST.1@-284.51,1257.25 -333.67,1209.72 ; RST.1@-279.9,1251.97 -333.67,1209.72 ; RST.1@-275.84,1246.22 -333.67,1209.72 ; RST.1@-272.38,1240.04 -333.67,1209.72 ; RST.1@-269.54,1233.47 -333.67,1209.72
NetOLED1_5: OLED1.4 R20.2 | length 720.7
  Top Layer w6: R20.2@974.57,899.34 1013.55,880.74 ; R20.2@977.55,904.61 1013.55,880.74 ; R20.2@981.22,909.38 1013.55,880.74 ; R20.2@982.52,911.77 1028.74,865.55 OLED1.4@1028.74,702.09 ; R20.2@983.5,896.46 cw(c983.5,861.89) 1007.95,886.34 ; R20.2@983.5,902.46 cw(c983.5,882.37) R20.2@997.71,896.58 ; R20.2@983.5,911.77 1013.55,880.74 ; R20.2@985.97,913.98 1013.55,880.74 ; R20.2@990.85,917.49 1013.55,880.74 ; R20.2@992.81,911.77 ccw(c1017.66,911.77) R20.2@1000.09,894.2 ; R20.2@996.21,920.3 1013.55,880.74 ; R20.2@998.81,911.77 ccw(c1038.14,911.77) 1010.33,883.96 ; OLED1.4@1023.89,760.62 1028.74,786.03 ; OLED1.4@1025.29,763.6 ccw(c1016.97,771.92) 1028.74,771.92 ccw(c1040.51,771.92) OLED1.4@1032.19,763.6 ; OLED1.4@1028.74,760.16 1028.74,786.03 ; OLED1.4@1033.59,760.62 1028.74,786.03
NetP13_3: P13.3 pad.1@-1212.48,3317.09 pad.1@-1317.48,2677.09 pad.1@-1317.48,2792.09 pad.1@-1317.48,3102.09 R28.2 R29.2 | length 4691.2
  Top Layer w7: pad.1@-1325.72,2678.14 -1317.48,2709.9 pad.1@-1309.24,2678.14 ; pad.1@-1325.72,2791.03 -1317.48,2759.28 pad.1@-1309.24,2791.03 ; pad.1@-1325.72,3103.14 -1317.48,3134.9 ; pad.1@-1323.36,2682.96 ccw(c-1337.54,2697.15) -1317.48,2697.15 ccw(c-1297.42,2697.15) pad.1@-1311.6,2682.96 ; pad.1@-1323.36,2786.21 cw(c-1337.54,2772.02) -1317.48,2772.02 cw(c-1297.42,2772.02) pad.1@-1311.6,2786.21 ; pad.1@-1323.36,3107.96 ccw(c-1337.54,3122.15) -1317.48,3122.15 ccw(c-1297.42,3122.15) pad.1@-1311.6,3107.96 ; pad.1@-1317.48,2677.09 pad.1@-1317.48,2792.09 ; pad.1@-1317.48,3097.09 -1317.48,3232.09 -1232.48,3317.09 ; pad.1@-1317.48,3102.09 -1317.48,3134.9 ; pad.1@-1309.24,3103.14 -1317.48,3134.9 ; pad.1@-1218.37,3311.22 ccw(c-1232.48,3297.18) -1232.48,3317.09 ; pad.1@-1218.37,3322.95 cw(c-1232.48,3336.99) -1232.48,3317.09 ; pad.1@-1214.21,3308.96 -1232.48,3317.09 ; pad.1@-1214.21,3325.22 -1232.48,3317.09 ; pad.1@-1212.8,3317.09 -1232.48,3317.09 ; pad.1@-1212.48,3317.09 -1232.48,3317.09
  Bottom Layer w7: P13.3@-2231.89,2411.85 -2172.63,2434.46 ; P13.3@-2228.99,2405.35 -2172.63,2434.46 ; P13.3@-2225.41,2399.27 -2172.63,2434.46 ; P13.3@-2221.2,2393.66 -2172.63,2434.46 ; P13.3@-2217.48,2389.61 -2147.48,2459.61 -2147.48,2612.09 -2082.48,2677.09 pad.1@-1317.48,2677.09 ; P13.3@-2217.48,2402.11 ccw(c-2217.48,2432.28) -2196.14,2410.95 ccw(c-2174.8,2389.61) P13.3@-2204.98,2389.61 ; P13.3@-2217.48,2409.11 ccw(c-2217.48,2456.18) -2184.19,2422.89 ccw(c-2150.9,2389.61) P13.3@-2197.98,2389.61 ; P13.3@-2217.48,2416.11 ccw(c-2217.48,2480.08) -2172.24,2434.84 ccw(c-2127,2389.61) P13.3@-2190.98,2389.61 ; P13.3@-2213.43,2385.89 -2172.63,2434.46 ; P13.3@-2207.81,2381.68 -2172.63,2434.46 ; P13.3@-2201.74,2378.1 -2172.63,2434.46 ; P13.3@-2195.24,2375.2 -2172.63,2434.46 ; pad.1@-1325.72,2793.14 -1317.48,2824.9 pad.1@-1309.24,2793.14 ; pad.1@-1325.72,3101.03 -1317.48,3069.28 ; pad.1@-1323.36,2671.21 ccw(c-1337.54,2657.02) -1337.54,2677.09 ccw(c-1337.54,2697.15) pad.1@-1323.36,2682.96 ; pad.1@-1323.36,2797.96 ccw(c-1337.54,2812.15) -1317.48,2812.15 ccw(c-1297.42,2812.15) pad.1@-1311.6,2797.96 ; pad.1@-1323.36,3096.21 cw(c-1337.54,3082.02) -1317.48,3082.02 cw(c-1297.42,3082.02) pad.1@-1311.6,3096.21 ; pad.1@-1318.53,2668.84 -1350.29,2677.09 pad.1@-1318.53,2685.33 ; pad.1@-1317.48,2792.09 pad.1@-1317.48,3102.09 -1317.48,3069.28 ; pad.1@-1309.24,3101.03 -1317.48,3069.28 ; R28.2@-1227.34,3393.31 -1212.8,3356.8 ; R29.2@-1223.27,3328.54 ccw(c-1248.54,3353.82) -1212.8,3353.82 ccw(c-1177.05,3353.82) R29.2@-1202.33,3328.54 ; R28.2@-1223.27,3385.63 cw(c-1248.54,3360.36) -1212.8,3360.36 cw(c-1177.05,3360.36) R28.2@-1202.33,3385.63 ; R29.2@-1220.77,3317.74 -1213.88,3352.02 ; R29.2@-1220.71,3318.28 -1211.66,3351.75 ; R29.2@-1220.56,3318.85 -1212.8,3357.38 ; R28.2@-1220.56,3395.33 -1212.8,3356.8 ; R29.2@-1218.36,3322.96 ccw(c-1231.78,3336.39) -1212.8,3336.39 ; R29.2@-1218.32,3323.59 ccw(c-1231.64,3336.92) -1212.8,3336.92 ccw(c-1193.95,3336.92) R29.2@-1207.27,3323.59 ; R28.2@-1218.32,3390.58 cw(c-1231.64,3377.25) -1212.8,3377.25 cw(c-1193.95,3377.25) R28.2@-1207.27,3390.58 ; R29.2@-1216.63,3309.89 R29.2@-1227.34,3320.86 ; R29.2@-1212.8,3317.09 R28.2@-1212.8,3397.09 ; R29.2@-1212.8,3318.07 -1212.8,3357.38 ; -1212.8,3337.91 ccw(c-1191.66,3337.91) R29.2@-1206.6,3322.96 ; R28.2@-1212.8,3396.1 -1212.8,3356.8 ; R29.2@-1212.69,3325.39 R29.2@-1227.34,3320.86 ; R29.2@-1212.26,3325.39 R29.2@-1198.25,3320.86 ; R29.2@-1208.17,3309.98 R29.2@-1198.25,3320.86 ; R29.2@-1205.03,3318.85 -1212.8,3357.38 ; R28.2@-1205.03,3395.33 -1212.8,3356.8 ; R29.2@-1204.27,3318.4 -1213.88,3352.02 ; R29.2@-1204.21,3317.89 -1211.66,3351.75 ; R28.2@-1198.25,3393.31 -1212.8,3356.8 ; R29.2@-1227.34,3320.86 pad.1@-1212.48,3317.09 ; R29.2@-1227.34,3320.86 -1212.8,3357.38 ; -1213.88,3352.02 pad.1@-1212.48,3317.09 ; -1212.8,3349.9 pad.1@-1212.48,3317.09 ; -1212.8,3349.9 -1204.25,3318.22 -1212.8,3349.9 ; -1212.8,3349.9 -1220.73,3318.06 -1212.8,3349.9 ; -1212.8,3349.9 pad.1@-1212.48,3317.09 ; -1212.8,3357.38 pad.1@-1212.48,3317.09 ; -1212.8,3357.38 -1204.22,3318.01 -1212.8,3357.38 ; -1212.8,3357.38 -1220.75,3317.88 -1212.8,3357.38 ; -1212.8,3357.38 pad.1@-1212.48,3317.09 ; -1212.8,3357.38 R29.2@-1198.25,3320.86 ; pad.1@-1212.48,3317.09 R29.2@-1198.25,3320.86 ; pad.1@-1212.48,3317.09 -1211.66,3351.75
NetP20_1: P20.1 R48.1 | length 1138.5
  Top Layer w7: P20.1@-140.92,771.99 -88.48,770 ; P20.1@-140.72,764.98 -88.48,770 ; P20.1@-140.18,779.03 -88.48,770 ; P20.1@-140,760 -88.48,770 ; P20.1@-138.81,755.12 -88.48,770 ; P20.1@-138.47,785.98 -88.48,770 ; P20.1@-136.45,756.45 cw(c-103.72,723.72) -103.72,770 ; P20.1@-136.37,748.53 -88.48,770 ; P20.1@-135,770 -40.31,770 ; P20.1@-133.05,742.29 -88.48,770 ; P20.1@-131.5,751.5 cw(c-86.82,706.82) -86.82,770 ; P20.1@-128.86,736.48 -88.48,770 ; P20.1@-126.55,746.55 cw(c-69.92,689.92) -69.92,770 ; P20.1@-121.6,741.6 cw(c-53.02,673.02) -53.02,770 ; P20.1@-121.6,778.4 ccw(c-101.31,798.69) -101.31,770 ; -37.27,766.96 ccw(c-10.31,793.91) R48.1@-10.31,755.79 ; -34.9,764.58 cw(c-58.49,740.98) R48.1@-25.12,740.98 ; R48.1@-25.32,755.01 ccw(c-10.31,770.02) R48.1@-10.31,748.79 ; R48.1@-22.33,732.34 -40.31,770 ; R48.1@-16.24,735.9 -40.31,770 ; R48.1@-10.31,740 -40.31,770 ; R48.1@-10.31,740.98 -40.31,770 ; R48.1@-5.44,747.08 -40.31,770 ; R48.1@-2.07,753.28 -40.31,770
NetP29_1: P29.1 P30.1 | length 568.2
  Top Layer w15: P29.1@343.26,765.68 407.8,707.2 ; P29.1@367.03,780 ccw(c444.35,780) 389.67,725.33 ; P29.1@379.79,789.66 407.8,707.2 ; P29.1@382.03,780 ccw(c495.56,780) 415.28,699.72 ; P30.1@460.94,680 435,680 360,755 P29.1@360,780 407.8,707.2
NetP29_2: P29.2 P30.2 | length 353.8
  Top Layer w15: P29.2@447.73,761.71 500.31,739.68 ; P29.2@460,757.97 cw(c460,704.79) 497.6,742.4 cw(c535.21,780) P29.2@482.03,780 ; P29.2@460,780 500.31,739.68 ; P29.2@478.29,792.27 500.31,739.68 ; P30.2@500.31,680 500.31,739.68 ; P30.2@500.31,700.16 500.31,739.68
NetP29_3: P29.3 P30.3 | length 867.9
  Top Layer w15: P29.3@538.11,782.45 P30.3@539.68,697.66 ; P29.3@538.12,782.53 P30.3@539.68,700.16 ; P30.3@539.68,677.96 cw(c661.77,677.96) P29.3@575.56,764.4 ; P30.3@539.68,680 539.68,759.68 P29.3@560,780 ; 539.69,714.11 cw(c625.72,714.11) P29.3@564.96,775.02 ; 539.69,750.26 cw(c589.67,750.26) P29.3@554.37,785.64 ; 539.68,755 P30.3@539.68,700.16 ; P29.3@580.43,771.76 P30.3@539.68,700.16 ; P29.3@580.52,771.99 P30.3@539.68,697.66 ; P30.3@539.68,697.66 P29.3@560,780 ; P30.3@539.68,700.16 P29.3@560,780
NetP29_4: P29.4 P30.4 | length 375.5
  Top Layer w15: P30.4@579.06,680 615,680 665,730 ; P29.4@639.1,773.06 665,730 ; P29.4@647.86,761.62 cw(c626.81,729.75) 665,729.75 ; 665,738.89 cw(c701.11,738.89) P29.4@675.58,764.42 ; P29.4@681.87,777.33 665,730 ; 665,730 P29.4@660,780 665,775 665,730
NetP31_3: P31.3 Q6.3 R47.2 | length 3316.3
  Top Layer w7: R47.2@385.46,1493.1 400,1529.62 ; R47.2@389.53,1500.79 ccw(c364.25,1526.06) 400,1526.06 ccw(c435.75,1526.06) R47.2@410.47,1500.79 ; R47.2@390,1490 420,1460 ; R47.2@390.34,1480.02 420,1460 ; R47.2@392.23,1491.09 400,1529.62 ; R47.2@394.48,1495.84 ccw(c381.15,1509.16) 400,1509.16 ccw(c418.85,1509.16) R47.2@405.52,1495.84 ; R47.2@394.86,1485.47 420,1460 ; R47.2@400,1490.32 400,1570.79 ; R47.2@400.98,1490.32 420,1460 ; R47.2@407.33,1485.77 ccw(c416.35,1479.33) 408.51,1471.49 ; R47.2@407.77,1491.09 400,1529.62 ; R47.2@408.01,1493.72 420,1460 ; R47.2@413.03,1481.7 ccw(c423.15,1474.46) 414.35,1465.65 ; R47.2@414.54,1493.1 400,1529.62 ; R47.2@414.88,1495.42 420,1460 ; Q6.3@420,1590.79 400,1570.79 ; P31.3@545.44,1232.06 603.61,1258.61 ; P31.3@548.74,1225.78 603.61,1258.61 ; P31.3@552.68,1219.95 603.61,1258.61 ; P31.3@559.37,1140 559.37,1214.37 690,1345 690,1460 420,1460 ; P31.3@559.37,1212.44 603.61,1258.61 ; P31.3@559.37,1229.5 ccw(c559.37,1266.03) 585.2,1240.2 ; P31.3@559.37,1236.5 ccw(c559.37,1289.93) 597.15,1252.15 ; P31.3@567.16,1206.07 603.61,1258.61 ; P31.3@569.43,1212.44 cw(c598.37,1212.44) P31.3@577.91,1232.91 ; P31.3@573.15,1202.39 603.61,1258.61 ; P31.3@576.43,1212.44 cw(c622.27,1212.44) 589.86,1244.86 ; P31.3@579.56,1199.36 603.61,1258.61 ; P31.3@583.43,1212.44 cw(c646.17,1212.44) 601.81,1256.81 ; 400,1570.79 Q6.3@420,1579.96 ; 400,1570.79 Q6.3@413.65,1588.04 ; 400,1570.79 Q6.3@421.98,1569.87 ; 400,1570.79 Q6.3@420,1579.96 ; 400,1570.79 Q6.3@413.65,1588.04 ; 400,1570.79 Q6.3@421.98,1569.87 ; 400,1570.79 Q6.3@420,1579.96 ; 400,1570.79 Q6.3@413.65,1588.04 ; 400,1570.79 Q6.3@421.98,1569.87 ; 400,1570.79 Q6.3@420,1579.96 ; 400,1570.79 Q6.3@413.65,1588.04 ; 400,1570.79 Q6.3@421.98,1569.87 ; 400,1570.79 Q6.3@420,1579.96 ; 400,1570.79 Q6.3@413.65,1588.04 ; 400,1570.79 Q6.3@421.98,1569.87 ; 400,1570.79 Q6.3@420,1579.96 ; 400,1570.79 Q6.3@413.65,1588.04 ; 400,1570.79 Q6.3@421.98,1569.87 ; 400,1570.79 Q6.3@420,1579.96 ; 400,1570.79 Q6.3@413.65,1588.04 ; 400,1570.79 Q6.3@421.98,1569.87 ; 400,1570.79 Q6.3@420,1579.96 ; 400,1570.79 Q6.3@413.65,1588.04 ; 400,1570.79 Q6.3@421.98,1569.87 ; 400,1570.79 Q6.3@420,1579.96 ; 400,1570.79 Q6.3@413.65,1588.04 ; 400,1570.79 Q6.3@421.98,1569.87 ; 400,1570.79 Q6.3@420,1579.96 ; 400,1570.79 Q6.3@413.65,1588.04 ; 400,1570.79 Q6.3@421.98,1569.87 ; 400,1570.79 Q6.3@420,1579.96 ; 400,1570.79 Q6.3@413.65,1588.04 ; 400,1570.79 Q6.3@421.98,1569.87 ; 400,1570.79 Q6.3@420,1579.96 ; 400,1570.79 Q6.3@413.65,1588.04 ; 400,1570.79 Q6.3@421.98,1569.87 ; 400,1570.79 Q6.3@420,1579.96 ; 400,1570.79 Q6.3@413.65,1588.04 ; 400,1570.79 Q6.3@421.98,1569.87 ; 400,1570.79 Q6.3@420,1579.96 ; 400,1570.79 Q6.3@413.65,1588.04 ; 400,1570.79 Q6.3@421.98,1569.87 ; 400,1570.79 Q6.3@420,1579.96 ; 400,1570.79 Q6.3@413.65,1588.04 ; 400,1570.79 Q6.3@421.98,1569.87 ; 400,1570.79 Q6.3@420,1579.96 ; 400,1570.79 Q6.3@413.65,1588.04 ; 400,1570.79 Q6.3@421.98,1569.87 ; 400,1570.79 Q6.3@420,1579.96 ; 400,1570.79 Q6.3@413.65,1588.04 ; 400,1570.79 Q6.3@421.98,1569.87 ; 400,1570.79 Q6.3@420,1579.96 ; 400,1570.79 Q6.3@413.65,1588.04 ; 400,1570.79 Q6.3@421.98,1569.87 ; 400,1570.79 Q6.3@420,1579.96 ; 400,1570.79 Q6.3@413.65,1588.04 ; 400,1570.79 Q6.3@421.98,1569.87 ; 400,1570.79 Q6.3@420,1579.96 ; 400,1570.79 Q6.3@413.65,1588.04 ; 400,1570.79 Q6.3@421.98,1569.87 ; 400,1570.79 Q6.3@420,1579.96 ; 400,1570.79 Q6.3@413.65,1588.04 ; 400,1570.79 Q6.3@421.98,1569.87 ; 402.39,1573.18 cw(c413.55,1562.02) Q6.3@418.89,1576.87 ; 402.39,1573.18 cw(c413.55,1562.02) Q6.3@418.89,1576.87 ; 402.39,1573.18 cw(c413.55,1562.02) Q6.3@418.89,1576.87
NetP31_4: P31.4 Q5.3 R45.2 | length 4040.8
  Top Layer w7: Q5.3@600,1590.79 660,1530.79 R45.2@660,1490.32 665.32,1485 705,1485 ; P31.4@622.27,1230.55 680.47,1265.47 ; P31.4@626.23,1224.68 680.47,1265.47 ; P31.4@630.74,1219.28 680.47,1265.47 ; P31.4@638.11,1212.44 680.47,1265.47 ; P31.4@638.11,1236.5 ccw(c638.11,1268.83) 660.97,1245.97 ; P31.4@640,1150 640,1225 710,1295 710,1480 705,1485 ; R45.2@645.46,1493.1 660,1529.62 ; P31.4@646.41,1206.76 680.47,1265.47 ; P31.4@648.17,1212.44 cw(c698.21,1212.44) 662.83,1247.83 ; R45.2@649.53,1500.79 ccw(c624.25,1526.06) 660,1526.06 ccw(c695.75,1526.06) R45.2@670.47,1500.79 ; R45.2@652.23,1491.09 660,1529.62 ; P31.4@652.67,1203.55 680.47,1265.47 ; R45.2@654.48,1495.84 ccw(c641.15,1509.16) 660,1509.16 ccw(c678.85,1509.16) R45.2@665.52,1495.84 ; P31.4@655.17,1212.44 cw(c722.11,1212.44) 674.78,1259.78 ; P31.4@659.27,1200.99 680.47,1265.47 ; R45.2@660.71,1482.51 700.62,1485 ; R45.2@660.98,1490.32 700.62,1485 ; R45.2@661.77,1475.53 700.62,1485 ; P31.4@662.17,1212.44 cw(c746.01,1212.44) 686.73,1271.73 ; R45.2@662.77,1497.91 700.62,1485 ; R45.2@665.64,1504.37 700.62,1485 ; R45.2@666.89,1495.42 ccw(c689.69,1515.14) 689.69,1485 ; R45.2@667.77,1491.09 660,1529.62 ; R45.2@671.45,1479.84 cw(c683.9,1467.4) 683.9,1485 ; R45.2@672.18,1500 ccw(c705,1528.39) 705,1485 ; R45.2@674.54,1493.1 660,1529.62 ; Q5.3@595.97,1570.51 628.63,1562.16 ; Q5.3@595.97,1570.51 628.63,1562.16 ; Q5.3@595.97,1570.51 628.63,1562.16 ; Q5.3@595.97,1570.51 628.63,1562.16 ; Q5.3@595.97,1570.51 628.63,1562.16 ; Q5.3@595.97,1570.51 628.63,1562.16 ; Q5.3@595.97,1570.51 628.63,1562.16 ; Q5.3@595.97,1570.51 628.63,1562.16 ; Q5.3@595.97,1570.51 628.63,1562.16 ; Q5.3@595.97,1570.51 628.63,1562.16 ; Q5.3@595.97,1570.51 628.63,1562.16 ; Q5.3@595.97,1570.51 628.63,1562.16 ; Q5.3@595.97,1570.51 628.63,1562.16 ; Q5.3@595.97,1570.51 628.63,1562.16 ; Q5.3@595.97,1570.51 628.63,1562.16 ; Q5.3@595.97,1570.51 628.63,1562.16 ; Q5.3@595.97,1570.51 628.63,1562.16 ; Q5.3@595.97,1570.51 628.63,1562.16 ; Q5.3@595.97,1570.51 628.63,1562.16 ; Q5.3@595.97,1570.51 628.63,1562.16 ; Q5.3@595.97,1570.51 628.63,1562.16 ; Q5.3@600,1569.68 cw(c600,1518.73) 636.03,1554.76 ; Q5.3@600,1569.68 cw(c600,1518.73) 636.03,1554.76 ; Q5.3@600,1569.68 cw(c600,1518.73) 636.03,1554.76 ; Q5.3@600,1576.68 cw(c600,1542.63) 624.08,1566.71 ; Q5.3@600,1576.68 cw(c600,1542.63) 624.08,1566.71 ; Q5.3@600,1576.68 cw(c600,1542.63) 624.08,1566.71 ; Q5.3@600,1579.96 628.63,1562.16 ; Q5.3@600,1579.96 628.63,1562.16 ; Q5.3@600,1579.96 628.63,1562.16 ; Q5.3@600,1579.96 628.63,1562.16 ; Q5.3@600,1579.96 628.63,1562.16 ; Q5.3@600,1579.96 628.63,1562.16 ; Q5.3@600,1579.96 628.63,1562.16 ; Q5.3@600,1579.96 628.63,1562.16 ; Q5.3@600,1579.96 628.63,1562.16 ; Q5.3@600,1579.96 628.63,1562.16 ; Q5.3@600,1579.96 628.63,1562.16 ; Q5.3@600,1579.96 628.63,1562.16 ; Q5.3@600,1579.96 628.63,1562.16 ; Q5.3@600,1579.96 628.63,1562.16 ; Q5.3@600,1579.96 628.63,1562.16 ; Q5.3@600,1579.96 628.63,1562.16 ; Q5.3@600,1579.96 628.63,1562.16 ; Q5.3@600,1579.96 628.63,1562.16 ; Q5.3@600,1579.96 628.63,1562.16 ; Q5.3@600,1579.96 628.63,1562.16 ; Q5.3@600,1579.96 628.63,1562.16 ; Q5.3@606.7,1587.76 628.63,1562.16 ; Q5.3@606.7,1587.76 628.63,1562.16 ; Q5.3@606.7,1587.76 628.63,1562.16 ; Q5.3@606.7,1587.76 628.63,1562.16 ; Q5.3@606.7,1587.76 628.63,1562.16 ; Q5.3@606.7,1587.76 628.63,1562.16 ; Q5.3@606.7,1587.76 628.63,1562.16 ; Q5.3@606.7,1587.76 628.63,1562.16 ; Q5.3@606.7,1587.76 628.63,1562.16 ; Q5.3@606.7,1587.76 628.63,1562.16 ; Q5.3@606.7,1587.76 628.63,1562.16 ; Q5.3@606.7,1587.76 628.63,1562.16 ; Q5.3@606.7,1587.76 628.63,1562.16 ; Q5.3@606.7,1587.76 628.63,1562.16 ; Q5.3@606.7,1587.76 628.63,1562.16 ; Q5.3@606.7,1587.76 628.63,1562.16 ; Q5.3@606.7,1587.76 628.63,1562.16 ; Q5.3@606.7,1587.76 628.63,1562.16 ; Q5.3@606.7,1587.76 628.63,1562.16 ; Q5.3@606.7,1587.76 628.63,1562.16 ; Q5.3@606.7,1587.76 628.63,1562.16
NetP32_2: P32.2 R50.2 | length 1626.4
  Top Layer w7: 430.97,1855.97 ccw(c368.3,1918.63) P32.2@456.65,1925.65 ; 441.69,1866.69 ccw(c388.18,1920.21) P32.2@463.62,1926.21 ; 452.42,1877.42 ccw(c408.05,1921.79) P32.2@470.6,1926.76 ; P32.2@458.64,1937.33 439.39,1864.39 ; 463.15,1888.15 ccw(c427.92,1923.37) P32.2@477.58,1927.32 ; R50.2@464.26,1491.58 475,1530.29 ; P32.2@465.38,1935.21 439.39,1864.39 ; R50.2@468.55,1500.79 ccw(c452.96,1516.37) 475,1516.37 ; R50.2@471.21,1490.29 475,1530.29 ; P32.2@471.86,1932.48 439.39,1864.39 ; 473.87,1898.87 ccw(c447.8,1924.95) P32.2@484.56,1927.87 ; 475,1518.86 ccw(c507.56,1518.86) R50.2@484.54,1495.84 ; 475,1535.76 ccw(c524.46,1535.76) R50.2@489.49,1500.79 ; R50.2@479.02,1490.32 475,1530.29 ; R50.2@480,1490.32 475,1495.32 475,1615 420,1670 420,1845 480,1905 P32.2@480,1985 ; P32.2@480.63,1927.56 439.39,1864.39 ; R50.2@486.67,1491.85 475,1530.29 ; P32.2@488.67,1921.51 439.39,1864.39 ; R50.2@493.22,1494.48 475,1530.29 ; P32.2@493.77,1916.68 439.39,1864.39 ; P32.2@498.42,1911.36 439.39,1864.39
NetQ1_B: Q1.1 R1.1 | length 1343.5
  Bottom Layer w30: Q1.1@753.31,2469.69 Q1.1@746.22,2476.77 ; R1.1@662.52,2476.77 Q1.1@742.48,2469.69 ; R1.1@662.52,2476.77 Q1.1@742.48,2469.69 ; R1.1@662.52,2476.77 Q1.1@742.48,2469.69 ; R1.1@662.52,2476.77 Q1.1@742.48,2469.69 ; R1.1@662.52,2476.77 Q1.1@742.48,2469.69 ; R1.1@662.52,2476.77 Q1.1@742.48,2469.69 ; R1.1@662.52,2476.77 Q1.1@742.48,2469.69 ; R1.1@662.52,2476.77 Q1.1@746.22,2476.77 ; R1.1@663.5,2476.77 Q1.1@746.22,2476.77 ; R1.1@663.5,2476.77 Q1.1@742.48,2469.69 ; R1.1@663.5,2476.77 Q1.1@742.48,2469.69 ; R1.1@663.5,2476.77 Q1.1@742.48,2469.69 ; R1.1@663.5,2476.77 Q1.1@742.48,2469.69 ; R1.1@663.5,2476.77 Q1.1@742.48,2469.69 ; R1.1@663.5,2476.77 Q1.1@742.48,2469.69 ; R1.1@663.5,2476.77 Q1.1@742.48,2469.69 ; 728.32,2476.77 cw(c728.32,2455.52) Q1.1@743.34,2470.55 ; 728.32,2476.77 cw(c728.32,2455.52) Q1.1@743.34,2470.55 ; 728.32,2476.77 cw(c728.32,2455.52) Q1.1@743.34,2470.55